# Altium PCB 5_TPS7A49可调低压降稳压器.PcbDoc
Units mm, origin at the board's own origin, x right, y up, seen from the top; angles counter-clockwise.
Board outline 19.68 x 12.7 mm, 2 copper layers (Top Layer, Bottom Layer); 10 components, 5 nets, 27 pads, 22 vias.
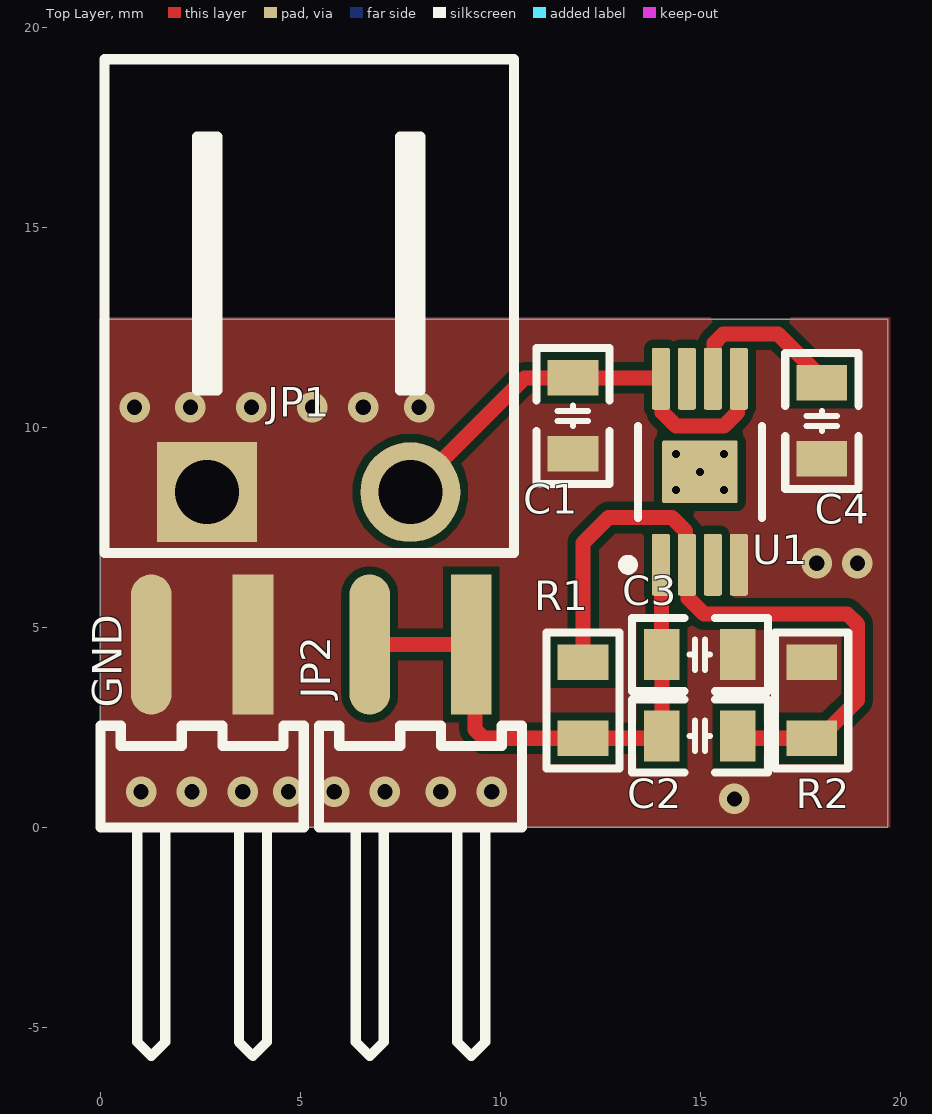
[diagram p0: Top Layer view]
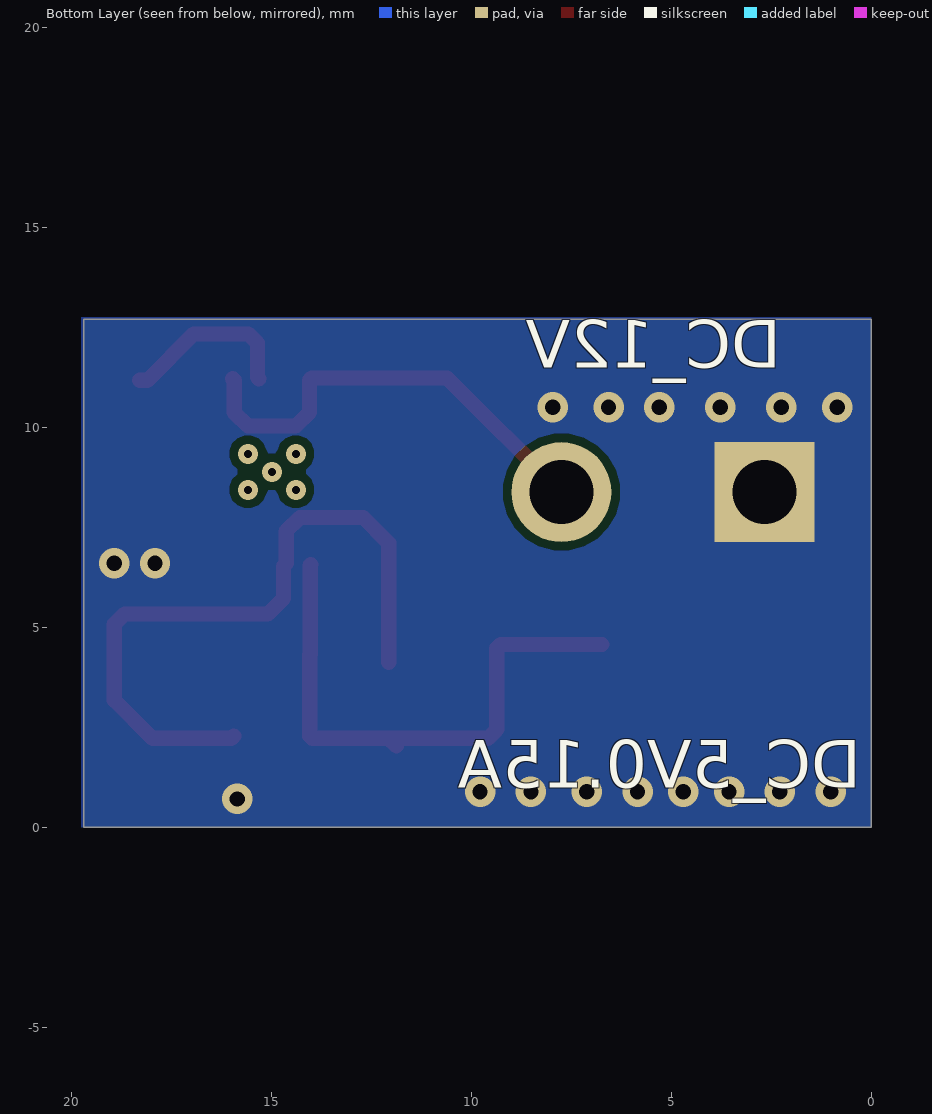
[diagram p1: Bottom Layer view, seen from below]

## Layer stack, top to bottom
Top Solder: solder mask 0.0102, Solder Resist, Dk 3.5
Top Layer: signal copper 0.0356
Dielectric 1: dielectric 0.32, FR-4, Dk 4.8
Bottom Layer: signal copper 0.0356
Bottom Solder: solder mask 0.0102, Solder Resist, Dk 3.5

## Board outline
0,0 19.685,0 19.685,12.7 0,12.7

## Design rules (kind name [scope] priority, off if disabled: settings)
Clearance [All] p1: gap=0.152 ignorepadtopadclearanceinfootprint=FALSE except(0.203: Arc-Poly Track-Poly SMDPad-Poly THPad-Poly Via-Poly Fill-Poly Poly-Poly)
PolygonConnect [All] p1: connectstyle=Direct reliefconductorwidth=0.254 reliefentries=4 polygonreliefangle="90 Angle" airgapwidth=0.254
RoutingVias [All] p1: holewidth=0.356 width=0.711 viastyle="Through Hole" minholewidth=0.025 minwidth=0.025 maxholewidth=0.711 maxwidth=1.27
SolderMaskExpansion [All] p1: expansion=0.102 istentingtop=FALSE
Width [All] p1: maxlimit=0.381 minlimit=0.025 preferedwidth=0.305
30 further rules are at their usual default settings.

## Components (designator, comment, footprint, x,y, rotation, side; value= is the part's Value field where it differs from the comment)
C1 "15uF" "C 0805_L" 11.811,10.287 r90 top
C2 "10nF" "C 0805_L" 14.986,2.286 r180 top
C3 "15uF" "C 0805_L" 14.986,4.318 r180 top
C4 "10nF" "C 0805_L" 18.034,10.16 r90 top
GND "HDR-1X2" HDR2.54-WS-2P 2.54,4.572 r180 top (schematic designator JP3)
JP1 "HDR-1X2" KF2EDGK5.08-WI-2P 5.207,8.382 r0 top
JP2 "HDR-1X2" HDR2.54-WS-2P 8.001,4.572 r180 top
R1 "39K" "R 0805_L" 12.065,3.175 r270 top
R2 "10K" "R 0805_L" 17.78,3.175 r270 top
U1 "TPS7A4901DGNT" DGN0008D_M 14.986,8.89 r90 top

## Footprints (in the part's own frame and the unit in brackets; to place one, negate y for a bottom-side part, rotate by r counter-clockwise, add the part's x,y. Pads: shape width x height; smd on the part's side, far side on the other; paste and mask are expansions set on the pad)
"C 0805_L" [mil] "无极性贴片电容                                        淘宝ID:黄晶宝石"
  rect 35x50 smd: 1(-37.4,0) 2(37.4,0)
  silkscreen extent -67,-36 67,36, body extent -39,-24 39,24, height 20
DGN0008D_M [mm] "TSOP, 8-Leads, Body 3.1x3.1mm, Pitch 0.65mm, Thermal Pad 1.65x1.51mm, IPC Low Density"
  rrect22% 1.55x0.45 smd: 1(-2.325,0.975) 2(-2.325,0.325) 3(-2.325,-0.325) 4(-2.325,-0.975) 5(2.325,-0.975) 6(2.325,-0.325) 7(2.325,0.325) 8(2.325,0.975)
  rrect6% 1.57x1.89 smd: 9(0,0)
  silkscreen extent -2.45,-1.55 1.15,1.92, body extent -2.45,-1.5 2.45,1.5, height 0.94
HDR2.54-WS-2P [mm] "2P卧式贴片排针2.54"
  rect 1.02x3.5 smd: 1(-1.27,0)
  oval 1.02x3.5 smd: 2(1.27,0)
  silkscreen extent -2.54,2.03 2.54,10.29, body extent -2.54,-0.76 2.54,10.34, height 2.54
KF2EDGK5.08-WI-2P [mm] "卧插端子"
  rect 2.5x2.5 hole 1.6: 1(-2.54,0)
  round 2.5 hole 1.6: 2(2.54,0)
  silkscreen extent -5.11,-1.52 5.13,10.82, body extent -5.08,-0.5 5.08,10.8, height 8.5
"R 0805_L" [mil] "1/8W贴片电阻"
  rect 35x50 smd: 1(-37.4,0) 2(37.4,0)
  silkscreen extent -67,-36 67,36, body extent -39,-25 39,25, height 20

## Part data
C1 C2 C3 C4: library part C, "贴片电容", BOM名称=贴片电容, 下单链接=https://item.taobao.com/item.htm?ft=t&id=613637044352, 淘宝ID=小糖豆的小窝窝
GND JP1 JP2: library part "Header 2", "2P接插件", BOM名称=2P接插件, 下单链接=https://item.taobao.com/item.htm?ft=t&id=613637044352, 淘宝ID=小糖豆的小窝窝
R1 R2: library part R, "贴片电阻", BOM名称=贴片电阻, 下单链接=https://item.taobao.com/item.htm?ft=t&id=613637044352, 淘宝ID=小糖豆的小窝窝
U1: library part CMP-0394-01238-2, "Single Output High PSRR LDO, 150 mA, Adjustable 1.2 to 33 V Output, 3 to 36 V Input, with Ultra-Low Noise, 8-pin MSOP (DGN), -40 to 125 degC, Green (RoHS & no Sb/Br)", Manufacturer="Texas Instruments", Power Good=TRUE, Accuracy(%)=1.5, Code_JEDEC=MO-187, ComponentLink1Description="Manufacturer URL", ComponentLink1URL=http://www.ti.com/, ComponentLink2Description=Datasheet, ComponentLink2URL=http://www.ti.com/general/docs/lit/getliterature.tsp?genericPartNumber=TPS7A4901&fileType=pdf, ComponentLink3Description="Package Specification", ComponentLink3URL=http://www.ti.com/litv/pdf/mpds046e, DatasheetVersion=SBVS121B, Eco-Plan="Green (RoHS & no Sb/Br)", Iout(Max)(A)=0.15, Iq(Typ)(mA)=0.06, Mounting Technology="Surface Mount", PackageDescription="8-pin Plastic Small Outline, Body 3 x 3 mm, Pitch 0.65 mm", PackageReference=DGN0008D, PackageVersion=4073271/F, PartNumber=TPS7A4901DGNT, SubFamily="Single Channel LDO", Vdo(Typ)(mV)=260, Vin(Max)(V)=36, Vin(Min)(V)=3, Vout Adj(Max)(V)=33, Vout Adj(Min)(V)=1.2

## Via types
v1: diameter 0.762, hole 0.381, Top Layer to Bottom Layer, 17 vias
v2: diameter 0.5, hole 0.2, Top Layer to Bottom Layer, 5 vias

## Nets (pads, with @x,y where several pads share a name; then routed paths per layer and width w, separated by ;. In a path a pad name is that pad's centre, name@x,y a point inside that pad or via, vN(x,y) a via of type N, cw(c..) or ccw(c..) an arc to the next point about the centre after c; other vN are vias at no path point)
+12: C1.2 JP1.2 U1.5 U1.8 | length 11.3
  Top Layer w0.381: JP1.2 10.602,11.237 C1.2 13.989,11.237 U1.8 14.046,11.181 14.046,10.375 14.387,10.033 15.585,10.033 15.927,10.375 15.927,11.181 U1.5
GND: C1.1 C3.1 C4.1 GND.1 GND.2 JP1.1 R2.1 U1.4
  other v1: 15.85,0.711 1.016,0.889 2.286,0.889 3.556,0.889 4.699,0.889 5.842,0.889 7.112,0.889 8.509,0.889 9.779,0.889 17.907,6.604 18.923,6.604 0.853,10.5 2.25,10.5 3.774,10.5 5.298,10.5 6.568,10.5 7.965,10.5
NetC2_1: C2.1 R1.1 R2.2 U1.2 | length 17.5
  Top Layer w0.381: R1.1 12.065,7.112 12.7,7.747 14.285,7.747 14.627,7.405 14.627,6.6 U1.2 14.696,6.531 14.696,5.725 15.086,5.334 18.669,5.334 18.923,5.08 18.923,3.178 17.97,2.225 R2.2 15.997,2.225 C2.1
NetC2_2: C2.2 C3.2 JP2.1 JP2.2 R1.2 U1.1 | length 14.1
  Top Layer w0.381: JP2.2 JP2.1 9.363,4.48 9.363,2.448 9.398,2.413 9.586,2.225 R1.2 ; R1.2@11.872,2.032 R1.2 ; U1.1 14.024,6.552 14.024,4.331 C3.2 C2.2 13.975,2.225 R1.2
NetC4_2: C4.2 U1.6 | length 4.4
  Top Layer w0.381: U1.6 15.346,11.25 15.346,12.11 15.569,12.333 16.941,12.333 18.098,11.176 C4.2@18.288,11.176
pads on no net: U1.3 U1.7 U1.9
copper on no net:
  other v2: 14.386,8.44 15.586,8.44 14.986,8.89 14.386,9.34 15.586,9.34

## Polygon pours and split planes (outlines as drawn)
GND on Top Layer "GND_L01_P000" (solid, remove dead copper, pour order 0): 0,12.75 19.75,12.75 19.75,0 0,0
GND on Bottom Layer "GND_L02_P001" (solid, remove dead copper, pour order 1): 0,12.75 0,0 19.75,0 19.75,12.75

## Silkscreen, mask and mechanical layers (free items; w line width, h text height)
Bottom Overlay:
  text "DC_12V" at 2.25,11.109 h2.03
  text "DC_5V0.15A" at 0.25,0.609 h2.03
Mechanical 1:
  the board outline again, w0.254